# Allegro board MV1.brd
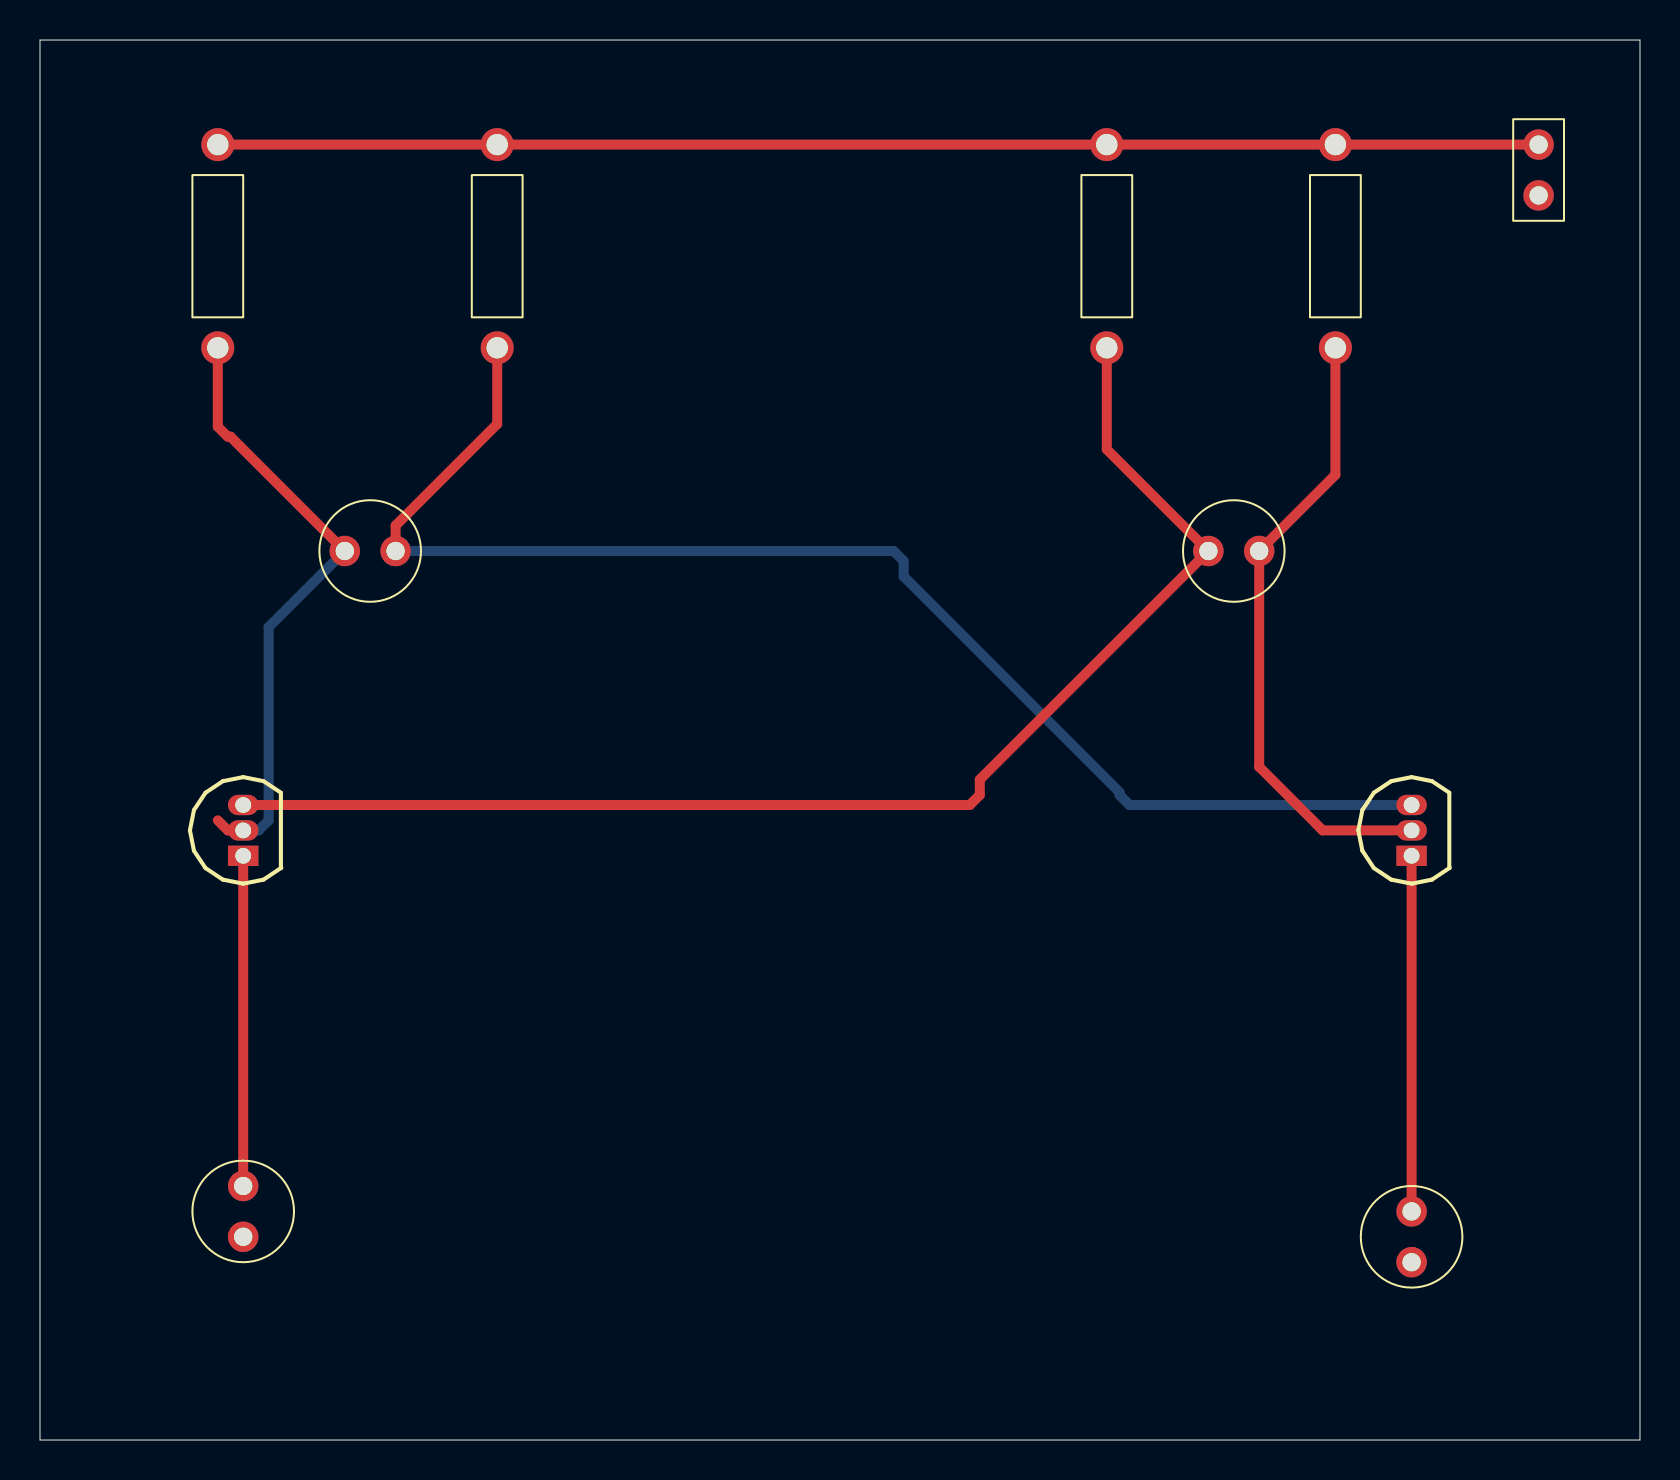
[diagram p0: board, top side]
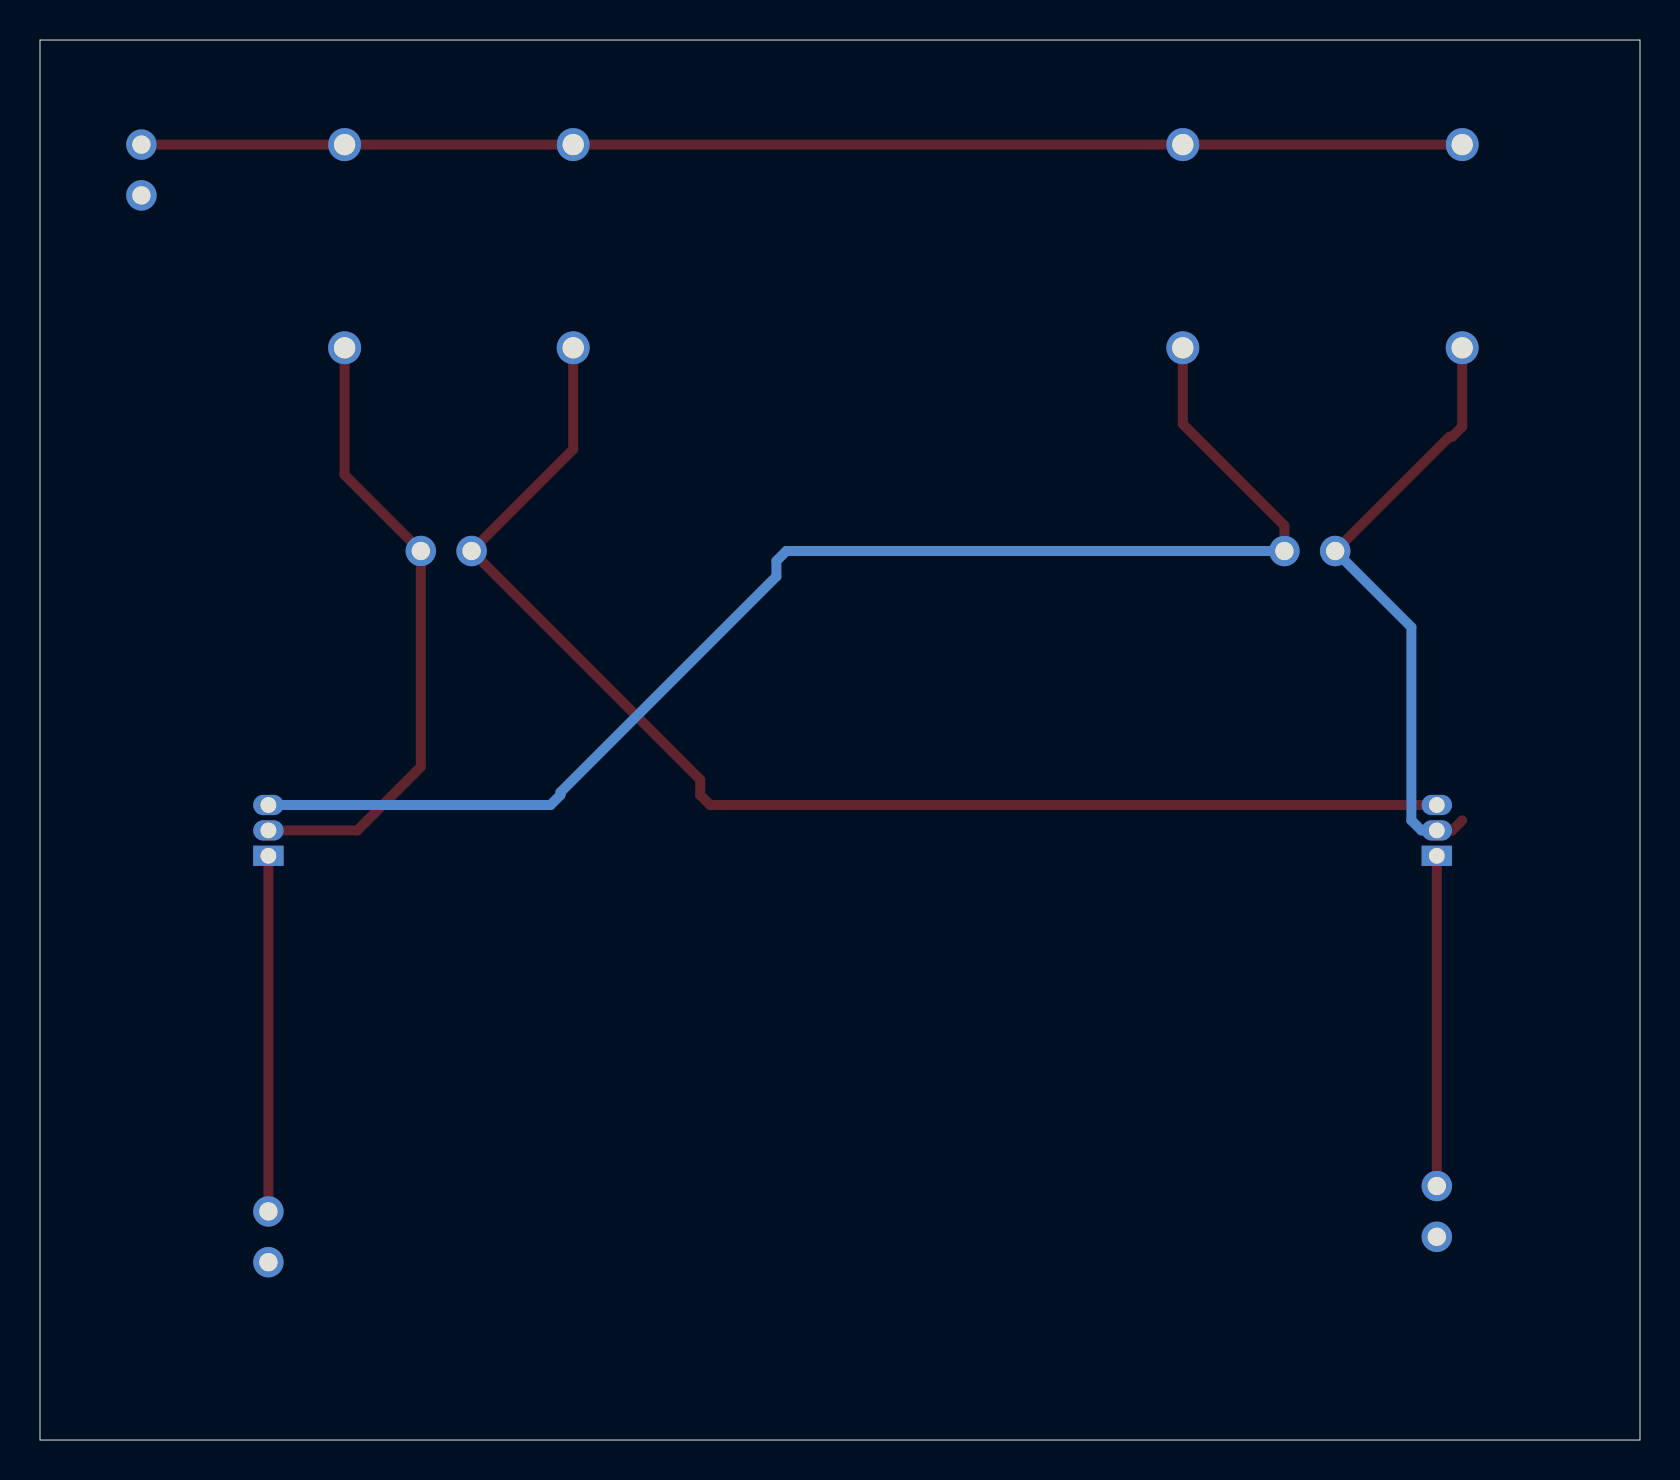
[diagram p1: board, bottom side, seen from below]

Outline 80 x 70 mm; copper layers: TOP, BOTTOM. Coordinates in mm from the lower left corner of the outline.
Outline path: 0,70 0,0 80,0 80,70 0,70

## Design rules (mm)
constraint set DEFAULT: min track width 0.5, pair gap 0.5

## Placement (name value [footprint] x y rotation side)
C1  CAP POL  [CAP196]  15.24 44.45 270 top
C2  CAP POL  [CAP196]  60.96 44.45 90 top
D1  LED  [CAP196]  10.16 10.16 0 top
D2  LED  [CAP196]  68.58 8.89 0 top
J1  CON2  [JUMPER2]  74.93 64.77 270 top
Q1  NPN ECB  [TO92]  68.58 29.21 90 top
Q2  NPN ECB  [TO92]  10.16 29.21 90 top
R1  220  [RES400]  8.89 64.77 180 top
R2  33k  [RES400]  22.86 64.77 180 top
R3  33k  [RES400]  53.34 64.77 180 top
R4  220  [RES400]  64.77 64.77 180 top

## Library data of the parts
C1 C2 = CAP POL: Tolerance: ***; User Part Number: ***
D1 D2 = LED: Tolerance: ***; User Part Number: ***
J1 = CON2: User Part Number: ***
Q1 Q2 = NPN ECB
R1-R4 = R: Tolerance: ***; User Part Number: ***

## Footprints (pads in the part's own frame, mm; a bottom-side part is the same pattern mirrored in y, then rotated)
CAP196
  round 1.524 hole 0.914: 1(0,0) 2(0,2.54)
JUMPER2
  round 1.524 hole 0.914: 1(0,0) 2(2.54,0)
RES400
  round 1.651 hole 1.067: 1(0,0) 2(0,10.16)
TO92
  rect 1.016x1.524 hole 0.787: 1(0,0)
  oval 1.016x1.524 hole 0.787: 2(1.27,0) 3(2.54,0)

## Nets
GND: D1.1(CATHODE) D2.1(CATHODE) J1.2
VCC: J1.1 R1.1 R2.1 R3.1 R4.1
N00504: C2.1 Q1.2 R4.2
N00511: C1.1 Q2.2 R1.2
N00526: C1.2 Q1.3 R2.2
N00533: C2.2 Q2.3 R3.2
N00540: D1.2 Q2.1(E)
N00557: D2.2 Q1.1(E)

## Via types
v1: diameter 0.61, hole 0.33, TOP to BOTTOM, 2 vias

## Routing (per net, layer and track width the routed paths; a pad name or vN(x,y) marks a point on that pad's centre or on a via; arc(x,y) is an arc through that point)
VCC: length 66
  TOP w0.5: J1.1 R4.1 R3.1 R2.1 R1.1
N00504: length 31.5
  TOP w0.5: Q1.2 64.14,30.48 60.96,33.66 C2.1 64.77,48.26 R4.2
N00511: length 30.9
  TOP w0.5: Q2.2 9.39,30.48 8.89,30.98 ; R1.2 8.89,50.66 9.39,50.16 9.53,50.16 v1(15.24,44.45)
  BOTTOM w0.5: v1(15.24,44.45) 11.43,40.64 11.43,30.98 10.93,30.48 Q2.2
N00526: length 68.9
  TOP w0.5: C1.2 17.78,45.72 22.86,50.8 R2.2
  BOTTOM w0.5: v1(68.58,31.75) 54.48,31.75 53.98,32.25 53.98,32.38 43.18,43.18 43.18,43.95 42.68,44.45 C1.2
N00533: length 66.2
  TOP w0.5: R3.2 53.34,49.53 C2.2 46.99,33.02 46.99,32.25 46.49,31.75 Q2.3
N00540: length 16.5
  TOP w0.5: Q2.1 D1.2
N00557: length 17.8
  TOP w0.5: Q1.1 D2.2
